# Altium PCB main.PcbDoc
Units mm, origin at the board's own origin, x right, y up, seen from the top; angles counter-clockwise.
Board outline 50 x 50 mm, 4 copper layers (Top Layer, Ground Layer, Power Layer, Bottom Layer), stack 1.591 mm thick; 34 components, 22 nets, 107 pads, 33 vias.
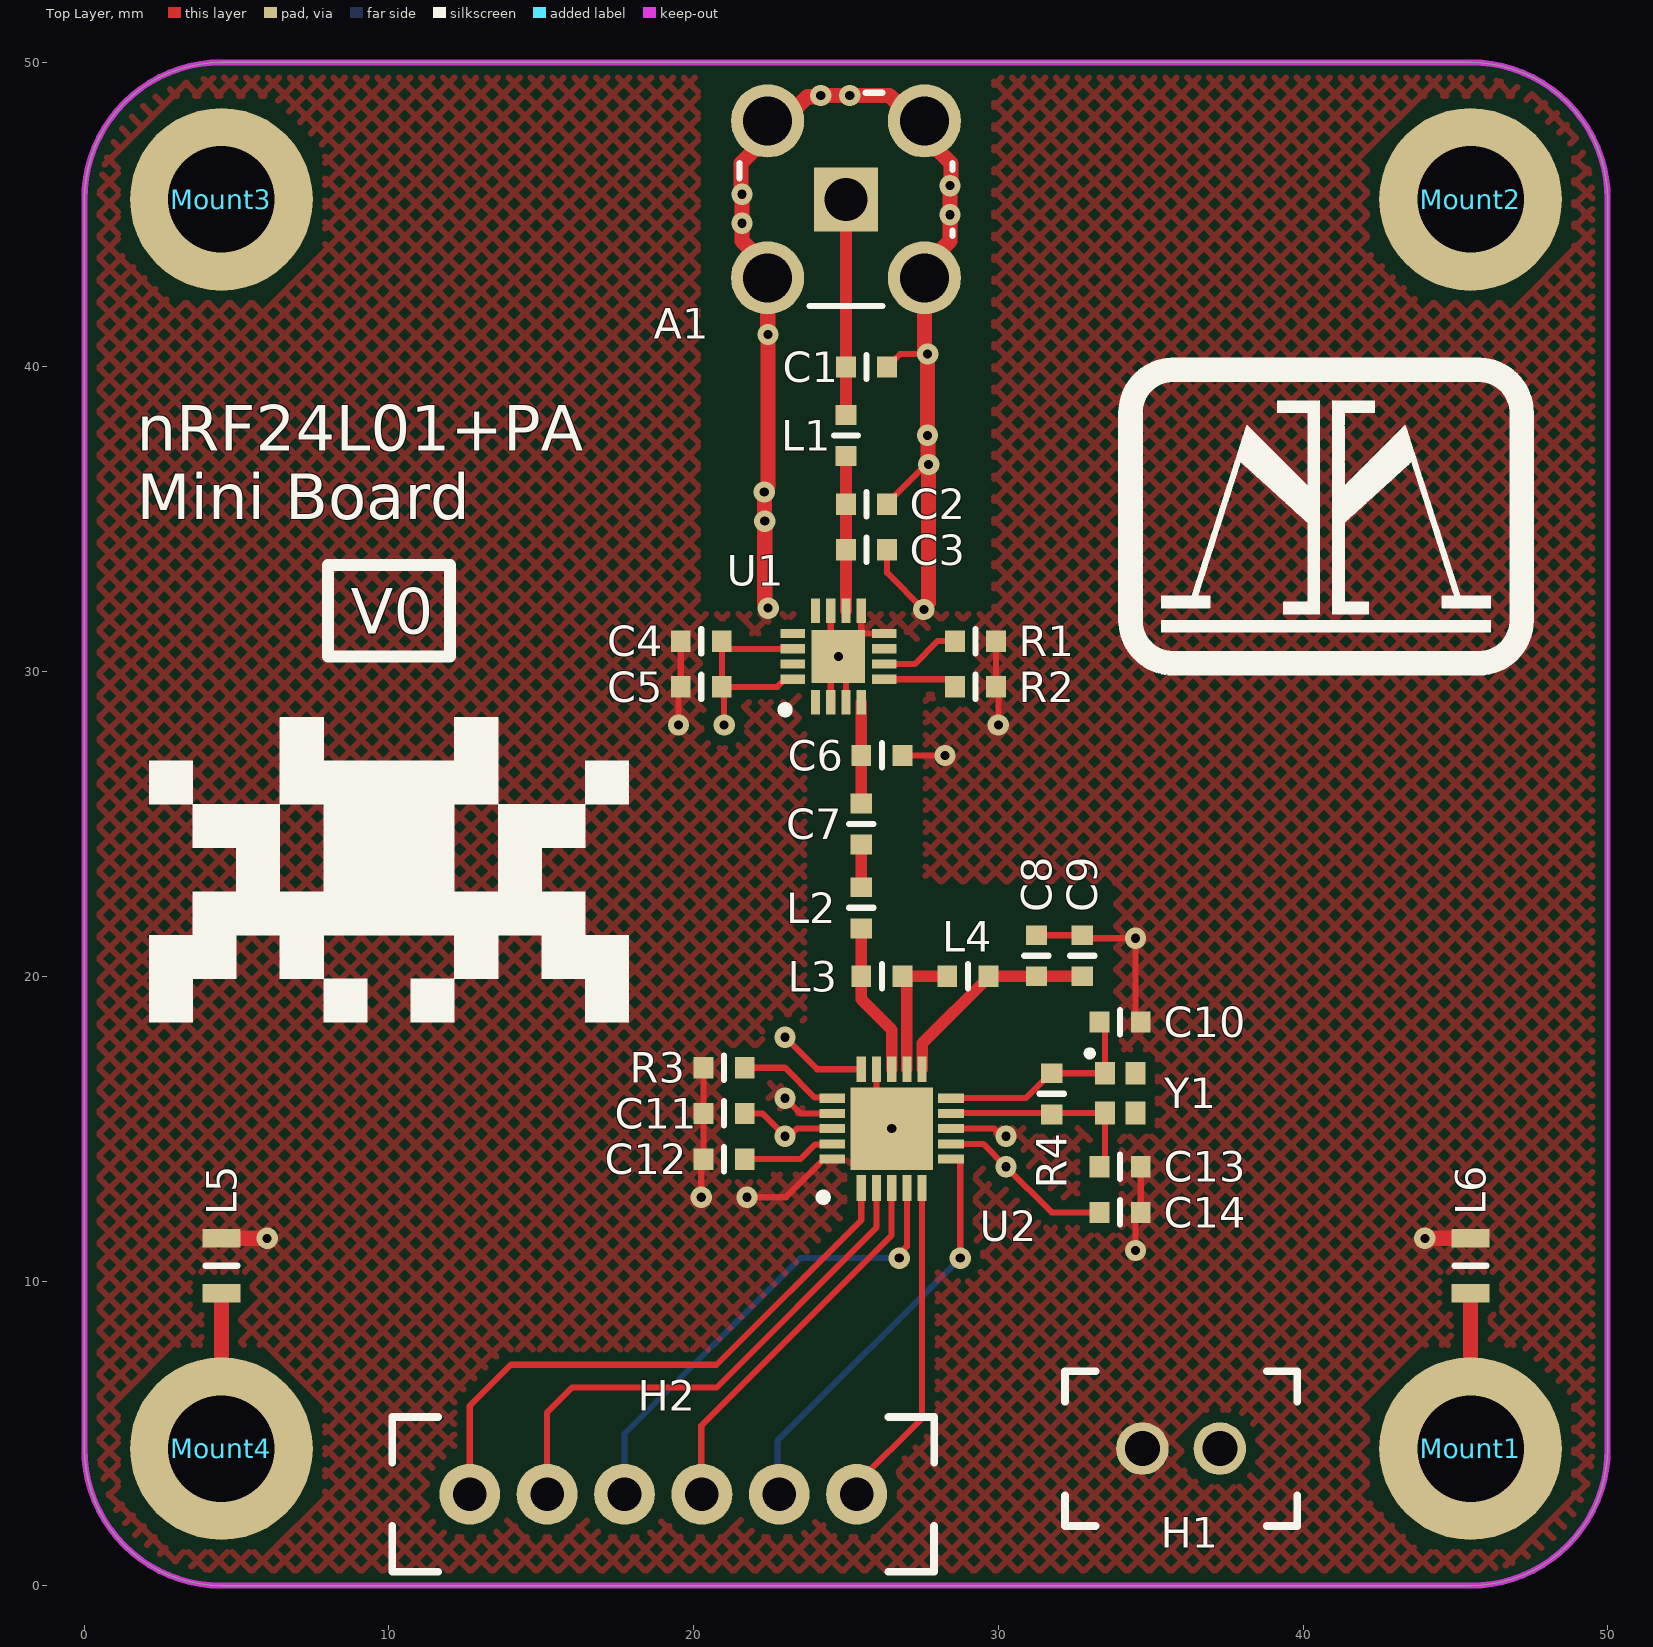
[diagram p0: Top Layer view]
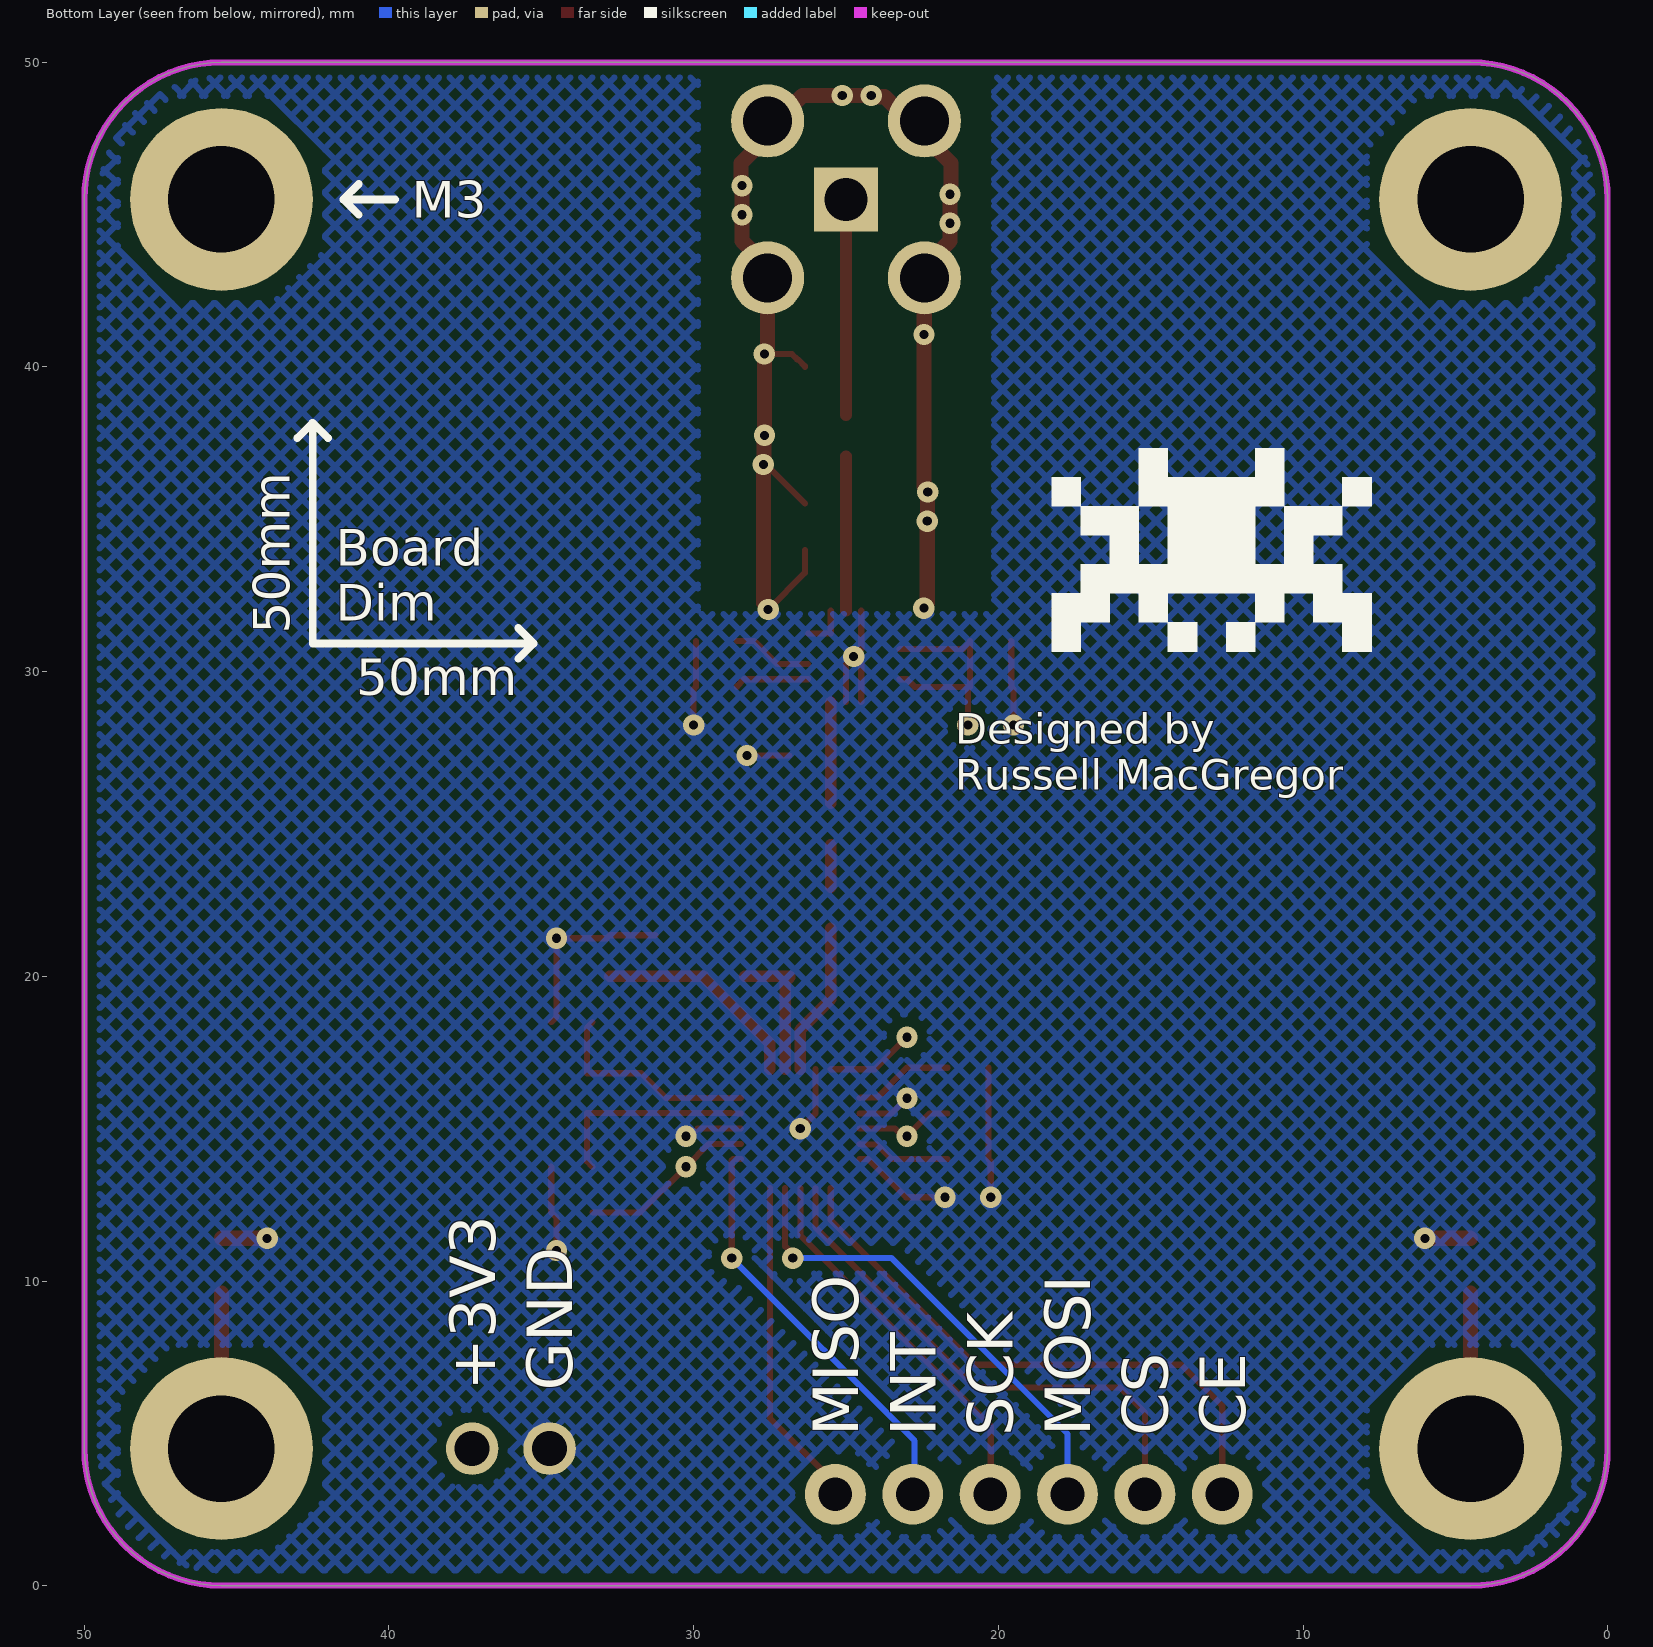
[diagram p1: Bottom Layer view, seen from below]
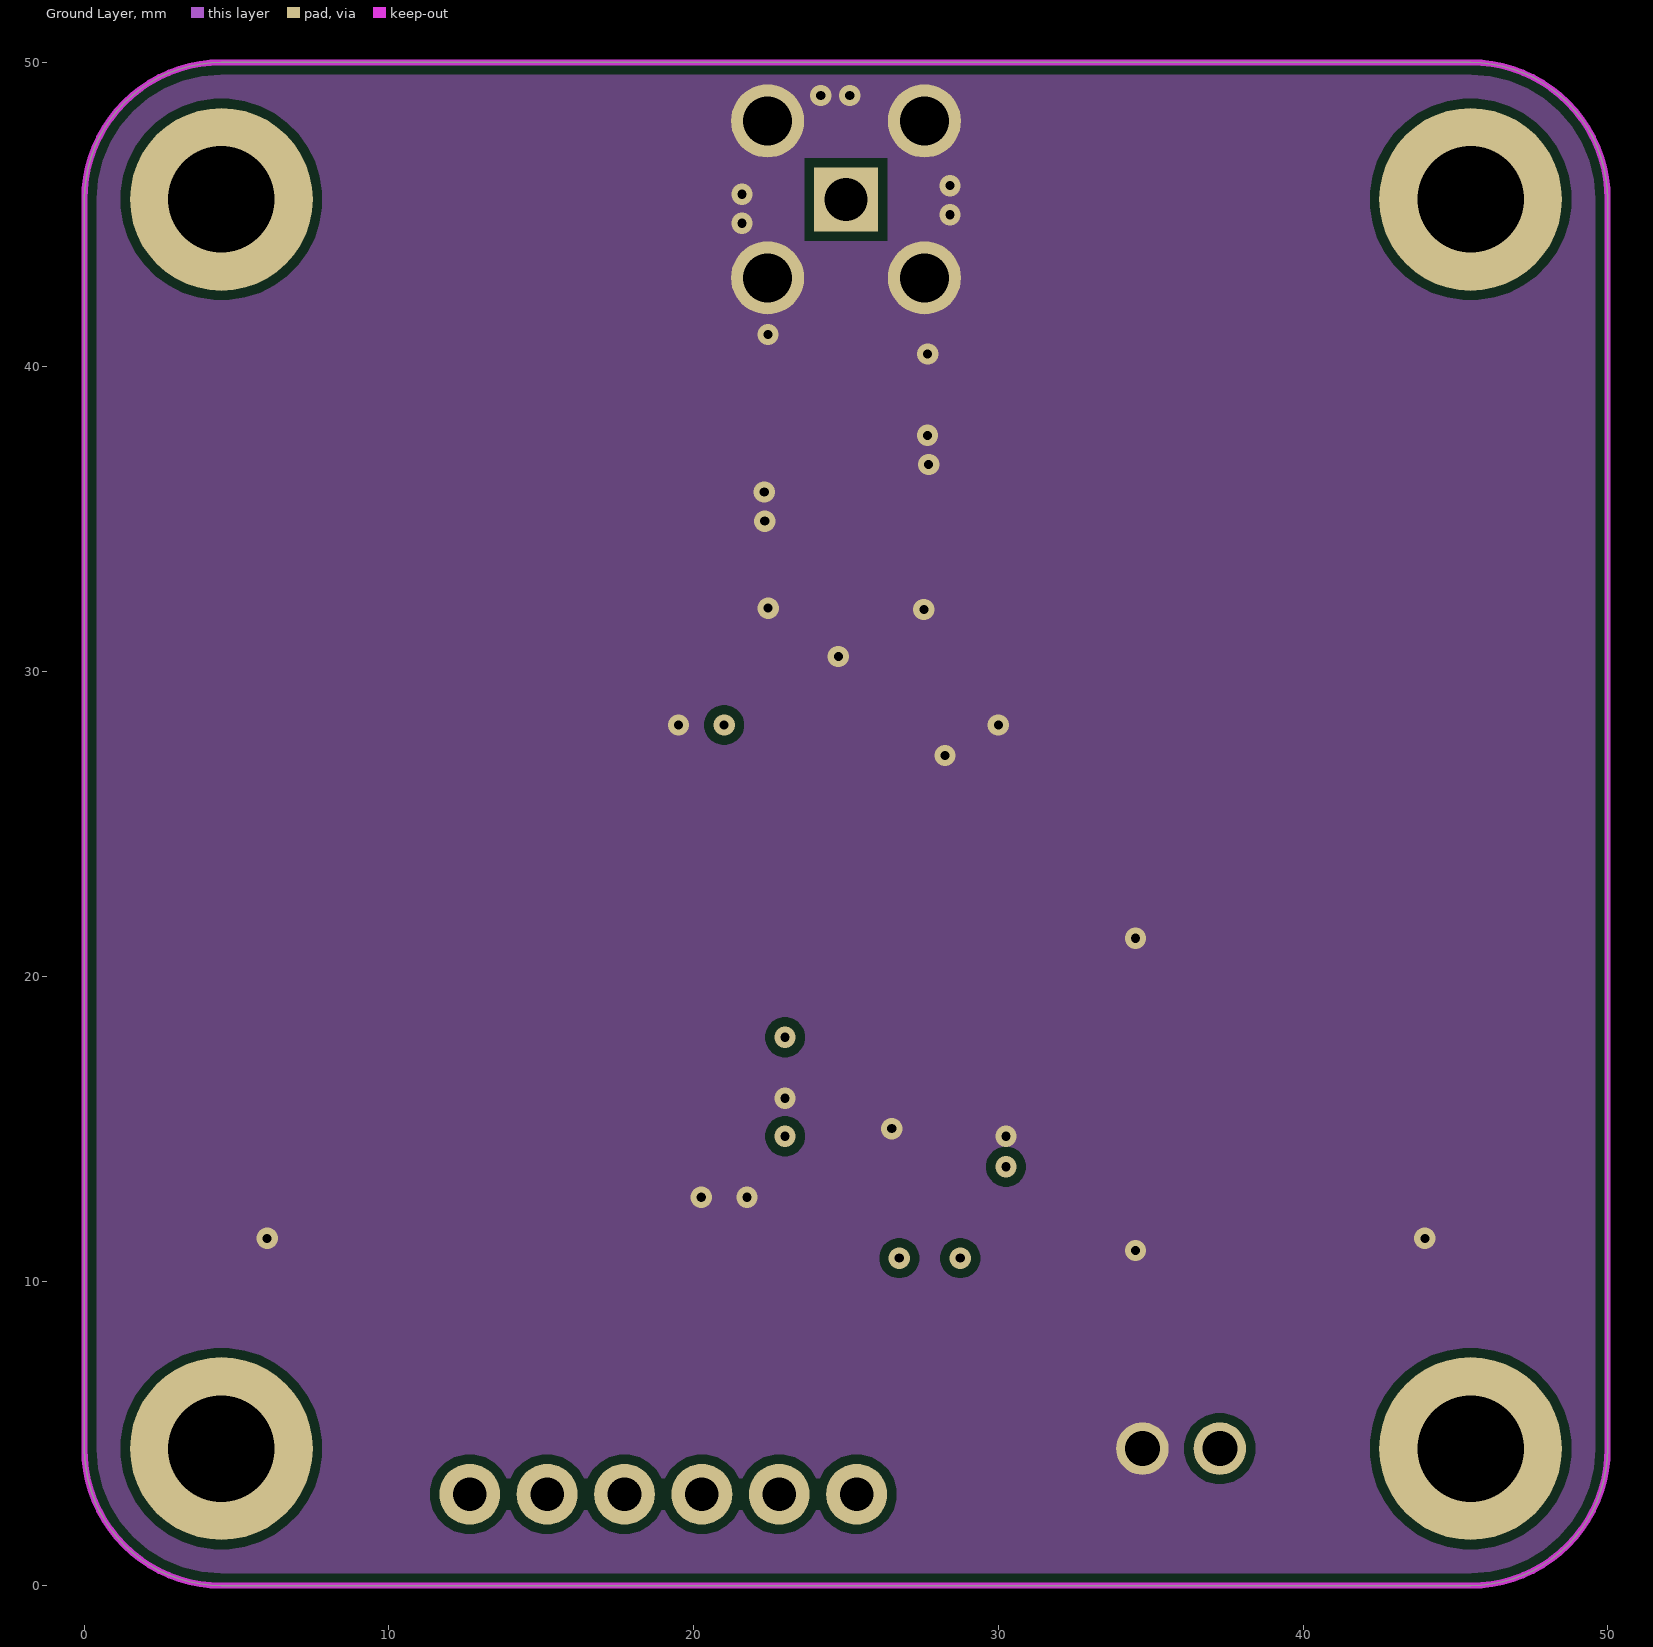
[diagram p2: Ground Layer]
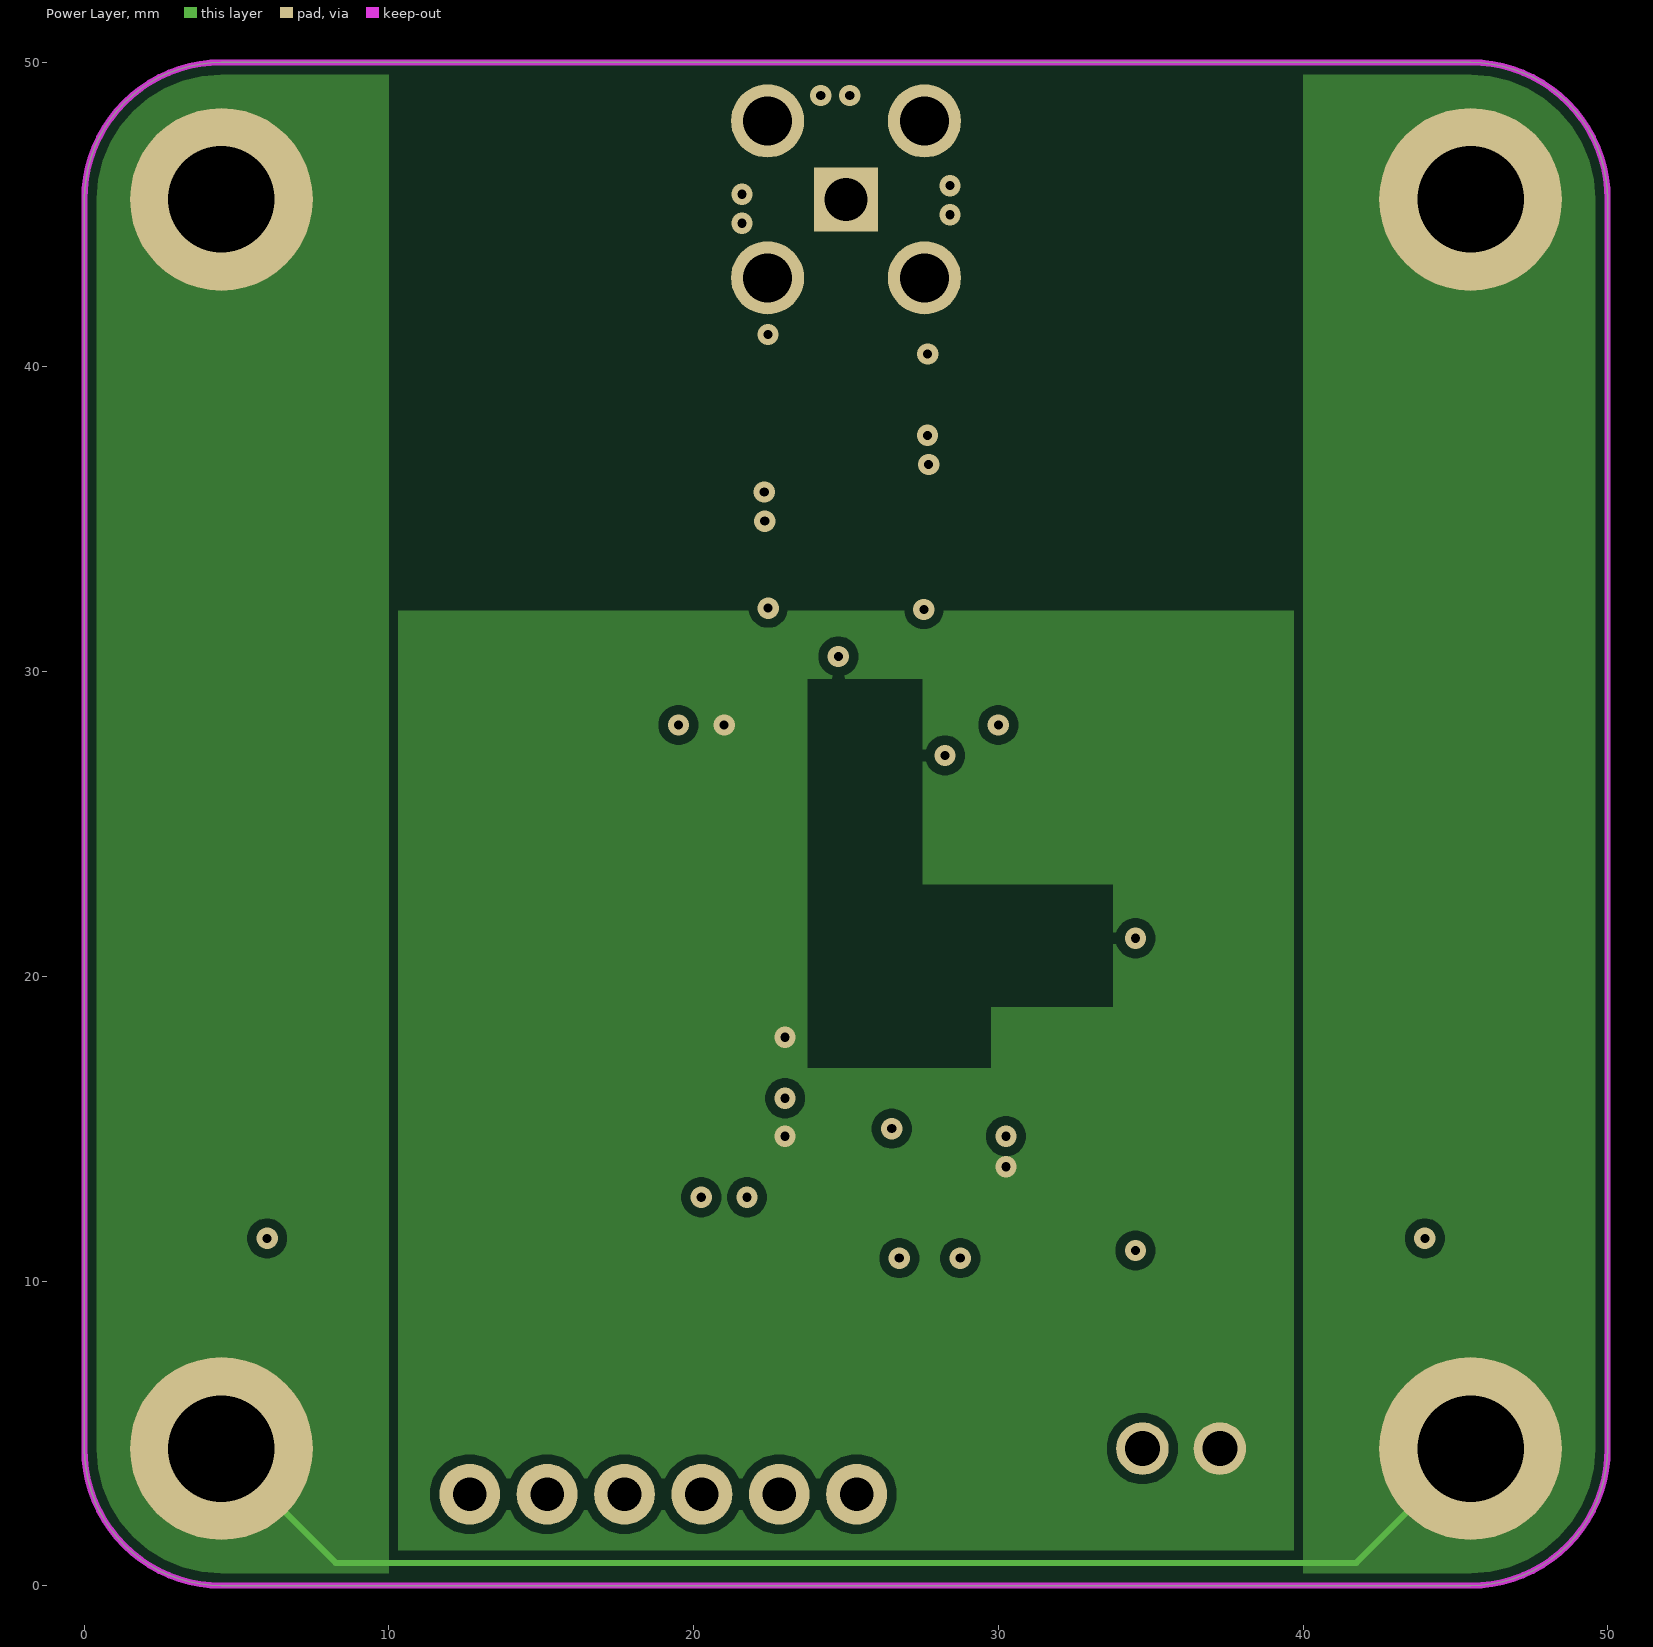
[diagram p3: Power Layer]
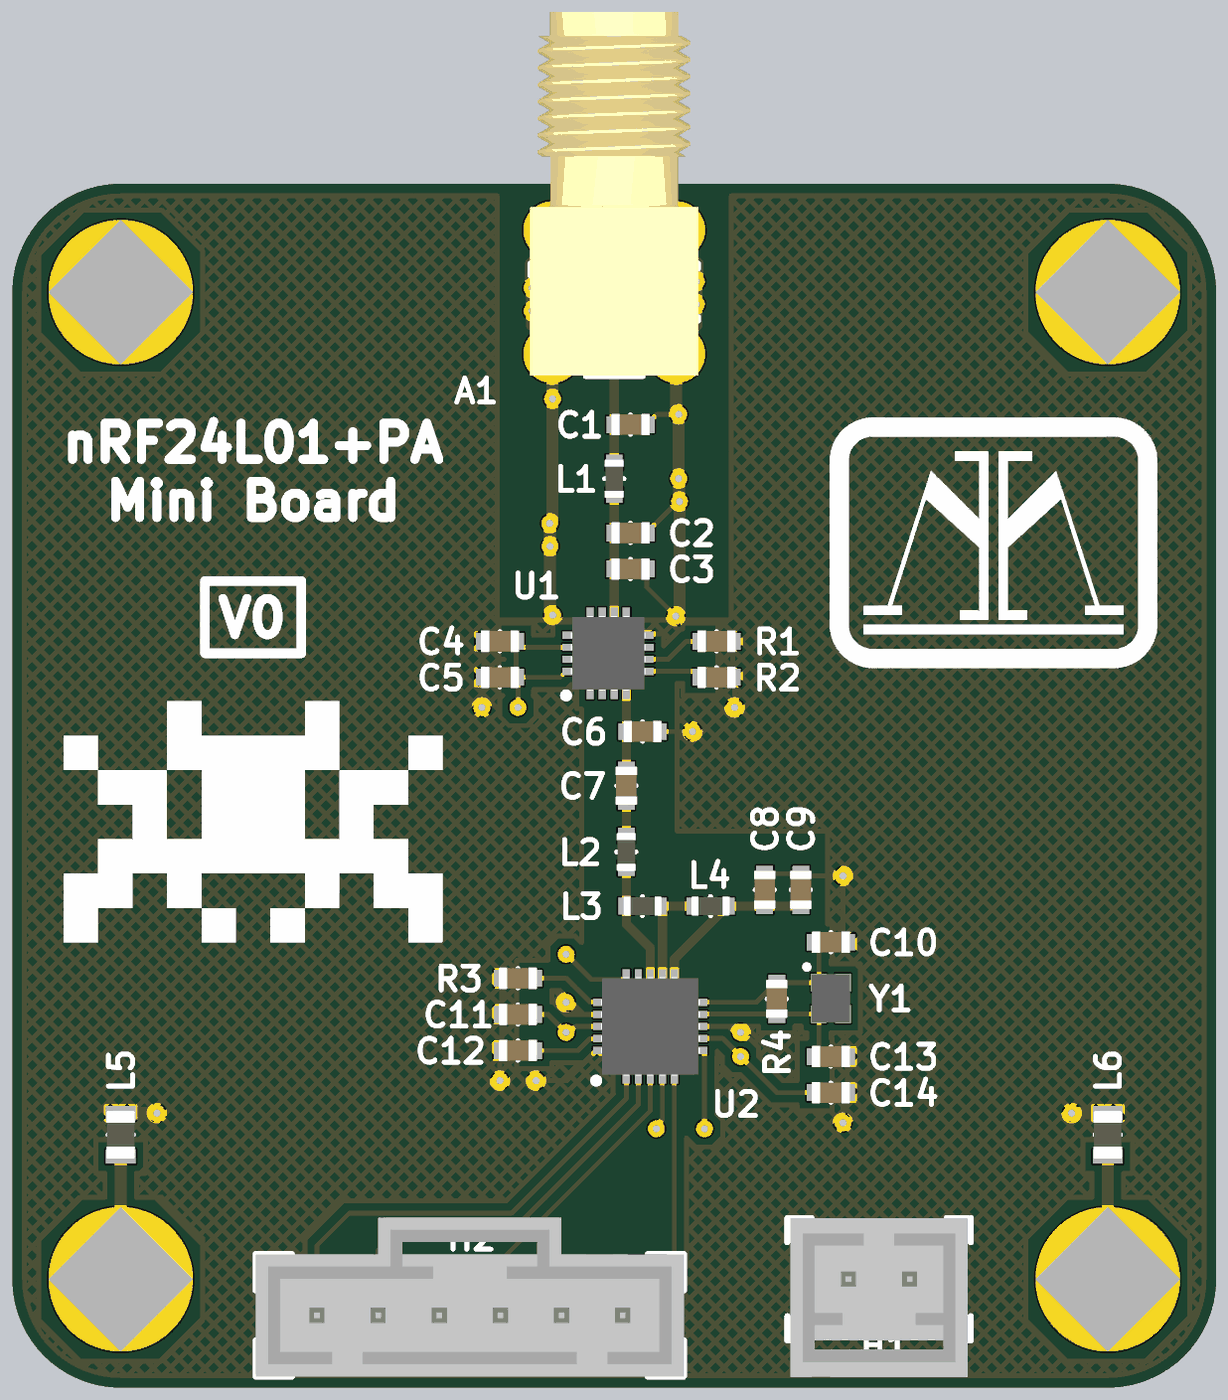
[diagram p4: 3D render of the assembled board from above, using the file's embedded part models]

## Layer stack, top to bottom
Top Solder: solder mask 0.0102, Solder Resist, Dk 3.8
Top Layer: signal copper 0.035
Dielectric 2: prepreg 0.2104, 7628*1, Dk 4.4
Ground Layer: signal copper 0.0175
Dielectric 1: dielectric 1.065, FR-4, Dk 4.8
Power Layer: signal copper 0.0175
Dielectric 3: prepreg 0.2104, 7628*1, Dk 4.4
Bottom Layer: signal copper 0.035
Bottom Solder: solder mask 0.0102, Solder Resist, Dk 3.8

## Board outline
4.5,0 cw(c4.5,4.5) 0,4.5 0,45.5 cw(c4.5,45.5) 4.5,50 45.5,50 cw(c45.5,45.5) 50,45.5 50,4.5 cw(c45.5,4.5) 45.5,0

## Design rules (kind name [scope] priority, off if disabled: settings)
BoardOutlineClearance [All] p1: gap=0.2 ignorepadtopadclearanceinfootprint=FALSE
Clearance "inPolygon Clearance" [InPolygon] p1: gap=0.3 ignorepadtopadclearanceinfootprint=TRUE // this rule ensures that every net within a polygon of a different net has a set clearance from the poly
Clearance "Different Diff Pair" [All] p2: gap=0.2 ignorepadtopadclearanceinfootprint=TRUE
Clearance "Same Diff Pair" [All] p3: gap=0.1 ignorepadtopadclearanceinfootprint=TRUE
Clearance "Different Nets" [not InAnyDifferentialPair] p4: gap=0.3 ignorepadtopadclearanceinfootprint=TRUE except(0.1: Arc-SMDPad Arc-THPad Arc-Via Arc-Text Track-SMDPad Track-THPad Track-Via Track-Text SMDPad-Text THPad-Text Via-Text Fill-Text Poly-Text Region-Text Text-Text; 0.12: Arc-Arc Arc-Track Track-Track; 0.15: SMDPad-SMDPad SMDPad-THPad SMDPad-Via THPad-THPad THPad-Via Via-Via; 0.2: Arc-Hole Track-Hole SMDPad-Hole THPad-Hole Via-Hole Fill-Hole Poly-Hole Region-Hole Text-Hole)
Clearance "Same Net" [not InAnyDifferentialPair] p5: gap=0 ignorepadtopadclearanceinfootprint=TRUE except(0.1: THPad-Via; 0.18: Arc-Arc Arc-Track Track-Track)
ComponentClearance [All] p1: gap=0.102 collisioncheckmode=3 verticalgap=0.102 showdistances=TRUE
DiffPairsRouting "Ethernet Routing" [InDifferentialPairClass('Ethernet_Pairs')] p1: maxlimit=0.25 minlimit=0.2 mostfreqgap=0.25 toplayer_maxgap=0.2 toplayer_prefgap=0.2 toplayer_minwidth=0.25 toplayer_maxwidth=0.25 toplayer_prefwidth=0.25 midlayer1_mingap=0.25 midlayer1_minwidth=0.19 midlayer1_maxwidth=0.19 midlayer1_prefwidth=0.19 midlayer2_mingap=0.25 midlayer2_minwidth=0.19 midlayer2_maxwidth=0.19 midlayer2_prefwidth=0.19 bottomlayer_maxgap=0.2 bottomlayer_prefgap=0.2 bottomlayer_minwidth=0.25 bottomlayer_maxwidth=0.25 bottomlayer_prefwidth=0.25 impedanceprofiledriven=TRUE maxuncoupledlength=12.7
DiffPairsRouting "USB Routing" [InDifferentialPairClass('USB_Pairs')] p2: maxlimit=0.291 minlimit=0.127 mostfreqgap=0.291 toplayer_maxgap=0.127 toplayer_prefgap=0.127 toplayer_minwidth=0.23 toplayer_maxwidth=0.23 toplayer_prefwidth=0.23 midlayer1_mingap=0.291 midlayer1_minwidth=0.25 midlayer1_maxwidth=0.25 midlayer1_prefwidth=0.25 midlayer2_mingap=0.291 midlayer2_minwidth=0.25 midlayer2_maxwidth=0.25 midlayer2_prefwidth=0.25 bottomlayer_maxgap=0.127 bottomlayer_prefgap=0.127 bottomlayer_minwidth=0.23 bottomlayer_maxwidth=0.23 bottomlayer_prefwidth=0.23 impedanceprofiledriven=TRUE maxuncoupledlength=12.7
DiffPairsRouting "CAN Routing" [InDifferentialPairClass('CAN_Pairs')] p3: maxlimit=0.907 minlimit=0.5 mostfreqgap=0.907 toplayer_maxgap=0.5 toplayer_prefgap=0.5 toplayer_minwidth=0.201 toplayer_maxwidth=0.201 toplayer_prefwidth=0.201 midlayer1_mingap=0.907 midlayer1_minwidth=0.155 midlayer1_maxwidth=0.155 midlayer1_prefwidth=0.155 midlayer2_mingap=0.907 midlayer2_minwidth=0.155 midlayer2_maxwidth=0.155 midlayer2_prefwidth=0.155 bottomlayer_maxgap=0.5 bottomlayer_prefgap=0.5 bottomlayer_minwidth=0.201 bottomlayer_maxwidth=0.201 bottomlayer_prefwidth=0.201 impedanceprofiledriven=TRUE maxuncoupledlength=12.7
Height [All] p1: minheight=0 maxheight=1816.048 prefheight=12.7
HoleSize [All] p1: absolutevalues=TRUE maxlimit=6.3 minlimit=0.3 maxpercent=80.000 minpercent=20.000
HoleToHoleClearance [All] p1: gap=0.25 allowstackedmicrovias=FALSE
Length [All] p1: maxlimit=43.432 minlimit=0 usedelayunits=TRUE mindelay=0.000000 maxdelay=10000.000000
MatchedLengths "Diff Pair Matched Delays" [InDifferentialPairClass('Ethernet_Pairs') or InDifferentialPairClass('USB_Pairs') or InDifferentialPairClass('CAN_Pairs')] p1: tolerance=5 checknetsindiffpair=TRUE checkdiffpairvsdiffpair=FALSE checkxsignals=FALSE checkothers=FALSE usedelayunits=TRUE delaytolerance=100.000000
MinimumAnnularRing [All] p1: minimumring=0.2
MinimumSolderMaskSliver [All] p1: minsoldermaskwidth=0
PlaneClearance "Supply Net Clearance" [InNetClass('Supply_Nets')] p1: clearance=0.5
PlaneClearance "All Nets" [All] p2: clearance=0.3
PolygonConnect "Supply Nets" [InNetClass('Supply_Nets')] p1: connectstyle=Direct reliefconductorwidth=0.3 reliefentries=4 polygonreliefangle="90 Angle" airgapwidth=0.254
PolygonConnect General [All] p2: connectstyle=Relief reliefconductorwidth=0.254 reliefentries=4 polygonreliefangle="90 Angle" airgapwidth=0.254
RoutingVias [All] p1: holewidth=0.2 width=0.35 viastyle="Through Hole" minholewidth=0.15 minwidth=0.3 maxholewidth=6.3 maxwidth=6.55
SilkToSilkClearance [All] p1: silktosilkclearance=0
SilkToSolderMaskClearance [All] p1: minsilkscreentomaskgap=0 clearancetoexposedcopper=TRUE
SolderMaskExpansion [All] p1: expansion=0.075 istentingtop=FALSE
SupplyNets "Schematic Supply Nets" [InNet('Earth')] p1: voltage=0.000
SupplyNets "Schematic Supply Nets_7" [InNet('+3V3')] p2: voltage=0.000
SupplyNets "Schematic Supply Nets_3" [InNet('GND')] p3: voltage=0.000
UnRoutedNet [All] p1: checkbadconnections=TRUE
Width "nRF Width" [InNetClass('nRF Signal')] p1: maxlimit=0.379 minlimit=0.263 preferedwidth=0.379 toplayer_minwidth=0.379 midlayer1_maxwidth=0.263 midlayer1_prefwidth=0.263 midlayer2_maxwidth=0.263 midlayer2_prefwidth=0.263 bottomlayer_minwidth=0.379 impedanceprofiledriven=TRUE minimp=50.000000 maximp=50.000000 favimp=50.000000 checkconnectedcopper=TRUE
Width [All] p2: maxlimit=100 minlimit=0.1 preferedwidth=0.2
20 further rules are at their usual default settings.

## Classes and differential pairs
net class Supply_Nets: +3V3 Earth GND
net class "nRF Signal": ANT1 ANT2 NetC2_2 NetC7_2 "SMA Antenna" TXRX VDD_PA
component class Main: A1 C1 C2 C3 C4 C5 C6 C7 C8 C9 C10 C11 C12 C13 C14 L1 L2 L3 L4 R1 R2 R3 R4 U1 U2 Y1
component class Connections: H1 H2 L5 L6 Mount1 Mount2 Mount3 Mount4

## Components (designator, comment, footprint, x,y, rotation, side; value= is the part's Value field where it differs from the comment)
A1 "RP-SMA 50-Ohm" "[SMA] RP-SMA 90deg Jack" 25,45.5 r0 top
C1 "SMD Nonpolarized" "[Cap] SMD 0603" 25.675,40 r180 top
C2 "SMD Nonpolarized" "[Cap] SMD 0603" 25.675,35.5 r180 top
C3 "SMD Nonpolarized" "[Cap] SMD 0603" 25.675,34 r180 top
C4 "SMD Nonpolarized" "[Cap] SMD 0603" 20.25,31 r0 top
C5 "SMD Nonpolarized" "[Cap] SMD 0603" 20.25,29.5 r0 top
C6 "SMD Nonpolarized" "[Cap] SMD 0603" 26.175,27.25 r0 top
C7 "SMD Nonpolarized" "[Cap] SMD 0603" 25.5,25 r270 top
C8 "SMD Nonpolarized" "[Cap] SMD 0603" 31.25,20.675 r270 top
C9 "SMD Nonpolarized" "[Cap] SMD 0603" 32.75,20.675 r270 top
C10 "SMD Nonpolarized" "[Cap] SMD 0603" 34,18.5 r0 top
C11 "SMD Nonpolarized" "[Cap] SMD 0603" 21,15.5 r0 top
C12 "SMD Nonpolarized" "[Cap] SMD 0603" 21,14 r0 top
C13 "SMD Nonpolarized" "[Cap] SMD 0603" 34,13.75 r0 top
C14 "SMD Nonpolarized" "[Cap] SMD 0603" 34,12.25 r180 top
H1 "1x2 Male" "[Header] Shrouded 1x2 Male" 36,4.5 r180 top
H2 "[Header] Shrouded 1x6 Male" "[Header] Shrouded 1x6 Male" 19,3 r0 top
L1 "SMD Inductor" "[Inductor] SMD 0603" 25,37.75 r90 top
L2 "SMD Inductor" "[Inductor] SMD 0603" 25.5,22.25 r90 top
L3 "SMD Inductor" "[Inductor] SMD 0603" 26.175,20 r180 top
L4 "SMD Inductor" "[Inductor] SMD 0603" 29,20 r0 top
L5 "652-MH2029-300Y" "[Ferrite] SMD Bead 0805 (1)" 4.5,10.5 r90 top
L6 "652-MH2029-300Y" "[Ferrite] SMD Bead 0805 (1)" 45.5,10.5 r90 top
Mount1 "M3 Mount Hole" "[Mount] M3 Mount Hole" 45.5,4.5 r0 top
Mount2 "M3 Mount Hole" "[Mount] M3 Mount Hole" 45.5,45.5 r0 top
Mount3 "M3 Mount Hole" "[Mount] M3 Mount Hole" 4.5,45.5 r0 top
Mount4 "M3 Mount Hole" "[Mount] M3 Mount Hole" 4.5,4.5 r0 top
R1 "[Res] SMD Resistor" "[Res] SMD 0603" 29.25,31 r180 top
R2 "[Res] SMD Resistor" "[Res] SMD 0603" 29.25,29.5 r180 top
R3 "[Res] SMD Resistor" "[Res] SMD 0603" 21,17 r0 top
R4 "[Res] SMD Resistor" "[Res] SMD 0603" 31.75,16.145 r270 top
U1 "RFX2401C" "[IC] RF Front-End" 24.75,30.5 r90 top
U2 "NRF24L01P" "[IC] NRF Transceiver" 26.5,15 r90 top
Y1 "16 MHz" "[XTAL] SMD 16MHz (2)" 34,16.17 r270 top

## Footprints (in the part's own frame and the unit in brackets; to place one, negate y for a bottom-side part, rotate by r counter-clockwise, add the part's x,y. Pads: shape width x height; smd on the part's side, far side on the other; paste and mask are expansions set on the pad)
"[Cap] SMD 0603" [mm]
  rect 0.65x0.7 smd: 1(-0.675,0) 2(0.675,0)
  silkscreen extent 0,-0.4 0,0.4, body extent -0.8,-0.45 0.8,0.45, height 0.8
"[Ferrite] SMD Bead 0805 (1)" [mm]
  rect 0.6x1.25 smd: 1(-0.9,0) 2(0.9,0)
  silkscreen extent 0,-0.53 0,0.53, body extent -1,-0.6 1,0.6, height 1.1
"[Header] Shrouded 1x2 Male" [mm]
  round 1.725 hole 1.15: 1(-1.27,0) 2(1.27,0)
  silkscreen extent -3.81,-2.54 3.81,2.54, body extent -3.68,-2.54 3.68,4.06, height 11.71
"[Header] Shrouded 1x6 Male" [mm]
  round 2 hole 1.1: 1(-6.35,0) 2(-3.81,0) 3(-1.27,0) 4(1.27,0) 5(3.81,0) 6(6.35,0)
  silkscreen extent -8.9,-2.54 8.9,2.54, body extent -8.89,-2.54 8.89,4.06, height 11.49
"[IC] NRF Transceiver" [mm] "NRF24L01P-R"
  rect 0.85x0.3 smd: 1(-1.95,1) 2(-1.95,0.5) 3(-1.95,0) 4(-1.95,-0.5) 5(-1.95,-1) 11(1.95,-1) 12(1.95,-0.5) 13(1.95,0) 14(1.95,0.5) 15(1.95,1)
  rect 0.3x0.85 smd: 6(-1,-1.95) 7(-0.5,-1.95) 8(0,-1.95) 9(0.5,-1.95) 10(1,-1.95) 16(1,1.95) 17(0.5,1.95) 18(0,1.95) 19(-0.5,1.95) 20(-1,1.95)
  rect 2.7x2.7 smd: 21(0,0)
  silkscreen extent -2.37,2.12 -2.13,2.37, body extent -2.05,-2.05 2.05,2.05, height 0.95
"[IC] RF Front-End" [mm] "RFX2401C"
  rect 0.8x0.3 smd: 1(-1.5,0.75) 2(-1.5,0.25) 3(-1.5,-0.25) 4(-1.5,-0.75) 9(1.5,-0.75) 10(1.5,-0.25) 11(1.5,0.25) 12(1.5,0.75)
  rect 0.3x0.8 smd: 5(-0.75,-1.5) 6(-0.25,-1.5) 7(0.25,-1.5) 8(0.75,-1.5) 13(0.75,1.5) 14(0.25,1.5) 15(-0.25,1.5) 16(-0.75,1.5)
  rect 1.75x1.75 smd: 17(0,0)
  silkscreen extent -1.87,1.62 -1.63,1.87, body extent -1.55,-1.55 1.55,1.55, height 0.6
"[Inductor] SMD 0603" [mm]
  rect 0.65x0.7 smd: 1(-0.675,0) 2(0.675,0)
  silkscreen extent 0,-0.4 0,0.4, body extent -0.8,-0.4 0.8,0.4, height 0.95
"[Mount] M3 Mount Hole" [mm] "Place at least 4.5mm from board edge. Plated."
  round 6 hole 3.5: 1(0,0)
"[Res] SMD 0603" [mm]
  rect 0.65x0.7 smd: 1(-0.675,0) 2(0.675,0)
  silkscreen extent 0,-0.4 0,0.4, body extent -0.8,-0.45 0.8,0.45, height 0.8
"[SMA] RP-SMA 90deg Jack" [mm]
  rect 2.1x2.1 hole 1.4: 1(0,0)
  round 2.4 hole 1.6: 2(-2.575,-2.575) 3(2.575,-2.575) 4(2.575,2.575) 5(-2.575,2.575)
  silkscreen extent -3.5,-3.5 3.5,3.5, body extent -3.5,-3.46 3.5,11.64, height 9.85
"[XTAL] SMD 16MHz (2)" [mm] "ABM11-16.000MHZ-12-N1G-T"
  rect 0.75x0.65 smd: 1(-0.65,-0.5) 2(0.65,-0.5) 3(0.65,0.5) 4(-0.65,0.5)
  silkscreen extent -1.4,-1.1 -1.2,-0.9, body extent -1,-0.8 1,0.8, height 0.69

## Part data
A1: library part "[SMA] RP-SMA 90deg Jack", "PCB.RPSMAFRA.HT", Supplier Part Number 1=931-1360-ND, Supplier 1=DigiKey
C1 C2: library part "[Cap] SMD Nonpolarized", Capacitance=1.2pF, Size Package=0603, Supplier Part Number 1=4713-CHV0603N2501R2BCT-ND, Tolerance=1%, Voltage=6.3V, Supplier 1=DigiKey
C3: library part "[Cap] SMD Nonpolarized", Capacitance=0.3pF, Size Package=0603, Supplier Part Number 1=712-QSCP251Q0R3A1GV001TCT-ND, Tolerance=5%, Voltage=6.3V, Supplier 1=DigiKey
C4: library part "[Cap] SMD Nonpolarized", Capacitance=1uF, Size Package=0603, Supplier Part Number 1=311-3485-1-ND, Tolerance=5%, Voltage=6.3V, Supplier 1=DigiKey
C5: library part "[Cap] SMD Nonpolarized", Capacitance=220pF, Size Package=0603, Supplier Part Number 1=399-C0603C221J5GAC7411CT-ND, Tolerance=5%, Voltage=6.3V, Supplier 1=DigiKey
C6: library part "[Cap] SMD Nonpolarized", Capacitance=1.0pF, Size Package=0603, Supplier Part Number 1=311-1049-1-ND, Tolerance=5%, Voltage=6.3V, Supplier 1=DigiKey
C7: library part "[Cap] SMD Nonpolarized", Capacitance=1.5pF, Size Package=0603, Supplier Part Number 1=311-1737-1-ND, Tolerance=5%, Voltage=6.3V, Supplier 1=DigiKey
C8: library part "[Cap] SMD Nonpolarized", Capacitance=4.7pF, Size Package=0603, Supplier Part Number 1=13-CC0603CPNPO9BN4R7CT-ND, Tolerance=5%, Voltage=6.3V, Supplier 1=DigiKey
C9: library part "[Cap] SMD Nonpolarized", Capacitance=2.2nF, Size Package=0603, Supplier Part Number 1=490-1459-1-ND, Tolerance=5%, Voltage=6.3V, Supplier 1=DigiKey
C10 C13: library part "[Cap] SMD Nonpolarized", Capacitance=14pF, Size Package=0603, Supplier Part Number 1=311-3887-1-ND, Tolerance=1%, Voltage=6.3V, Supplier 1=DigiKey
C11: library part "[Cap] SMD Nonpolarized", Capacitance=1nF, Size Package=0603, Supplier Part Number 1=490-1451-6-ND, Tolerance=5%, Voltage=6.3V, Supplier 1=DigiKey
C12: library part "[Cap] SMD Nonpolarized", Capacitance=33nF, Size Package=0603, Supplier Part Number 1=311-4015-1-ND, Tolerance=5%, Voltage=6.3V, Supplier 1=DigiKey
C14: library part "[Cap] SMD Nonpolarized", Capacitance=10nF, Size Package=0603, Supplier Part Number 1=399-C0603C103J5RACTUDKR-ND, Tolerance=5%, Voltage=6.3V, Supplier 1=DigiKey
H1: library part "[Header] Shrouded 1x2 Male", "0705430036 / Mates with 0050579402", Supplier Part Number 1=WM4824-ND, Supplier 1=DigiKey, Supplier 2=DigiKey, Supplier Part Number 2=WM2900-ND
H2: "0705430005 / Mates with 0050579406", Supplier Part Number 1=WM4804-ND, Supplier 1=DigiKey, Supplier 2=DigiKey, Supplier Part Number 2=WM2904-ND
L1: library part "[Inductor] SMD Inductor", Inductance=2.7nH, Size Package=0603, Supplier Part Number 1=732-7447860027GCT-ND, Supplier 1=DigiKey
L2: library part "[Inductor] SMD Inductor", Inductance=3.9nH, Size Package=0603, Supplier Part Number 1=490-1105-1-ND, Supplier 1=DigiKey
L3: library part "[Inductor] SMD Inductor", Inductance=8.2nH, Size Package=0603, Supplier Part Number 1=490-1109-1-ND, Supplier 1=DigiKey
L4: library part "[Inductor] SMD Inductor", Inductance=2.7nH, Size Package=0603, Supplier Part Number 1=490-1103-1-ND, Supplier 1=DigiKey
L5 L6: library part "[Ferrite] SMD Ferrite Bead (1)", Res @ Freq="30 @ 100MHz", Size Package=0805, Supplier Part Number 1=MH2029-300YCT-ND, Supplier 1=DigiKey
Mount1 Mount2 Mount3 Mount4: library part "[Mount] M3 Mount Hole", "Place at least 4.5mm from board edge. Plated."
R1 R2: "Generic", Resistance=10k, Size Package=0603, Supplier Part Number 1=311-10.0KHRDKR-ND, Tolerance=5%, Supplier 1=DigiKey
R3: "Generic", Resistance=22k, Size Package=0603, Supplier Part Number 1=311-22.0HRDKR-ND, Tolerance=1%, Supplier 1=DigiKey
R4: "Generic", Resistance=1Meg, Size Package=0603, Supplier Part Number 1=YAG4498CT-ND, Tolerance=1%, Supplier 1=DigiKey
U1: library part "[IC] RF Front-End", Supplier Part Number 1=863-1828-1-ND, Supplier 1=DigiKey
U2: library part "[IC] NRF Transceiver", "NRF24L01P-R", Supplier Part Number 1=4823-NRF24L01P-RCT-ND, Supplier 1=DigiKey
Y1: library part "[XTAL] SMD 16MHz (2)", "ABM11-16.000MHZ-12-N1G-T", Supplier Part Number 1=535-14950-1-ND, Supplier 1=DigiKey

## Via types
v1: diameter 0.7, hole 0.3, Top Layer to Bottom Layer, 33 vias

## Nets (pads, with @x,y where several pads share a name; then routed paths per layer and width w, separated by ;. In a path a pad name is that pad's centre, name@x,y a point inside that pad or via, vN(x,y) a via of type N, cw(c..) or ccw(c..) an arc to the next point about the centre after c; other vN are vias at no path point)
+3V3: C4.2 C5.2 C11.2 C14.2 H1.1 U1.14 U1.16 U2.7 U2.15 U2.18 | length 19.7
  Top Layer w0.2: C4.2@20.925,30.975 21.15,30.75 U1.14 ; C4.2 C5.2 ; v1(21,28.25) 21,29.425 C5.2 ; C11.2 22.25,15.5 v1(23,14.75) 23.135,14.75 23.385,15 U2.18 ; v1(23,18) 24.05,16.95 U2.15 ; U1.16 23,29.75 22.75,29.5 C5.2 ; U2.7 29.5,14.5 v1(30.25,13.75) 31.75,12.25 C14.2
ANT1: L3.1 L4.1 U2.12 | length 4.6
  Top Layer w0.379: U2.12 27,19.825 26.85,19.975 L3.1 L4.1
ANT2: L2.1 L3.2 U2.13 | length 5
  Top Layer w0.379: L2.1 L3.2 25.5,19.25 26.5,18.25 U2.13
Earth: L5.1 L6.1 Mount1.1 Mount2.1 Mount3.1 Mount4.1 | length 54.3
  Top Layer w0.5: Mount4.1 L5.1 ; Mount1.1 L6.1
  Power Layer w0.2: Mount4.1 8.25,0.75 41.75,0.75 Mount1.1
GND: A1.2 A1.3 A1.4 A1.5 C1.1 C2.1 C3.1 C4.1 C5.1 C6.2 C8.1 C9.1 C10.2 C11.1 C12.1 C13.2 C14.1 H1.2 L5.2 L6.2 R1.1 R2.1 R3.1 U1.2 U1.3 U1.8 U1.9 U1.11 U1.17 U2.8 U2.14 U2.17 U2.20 U2.21 | length 82.8
  Top Layer w0.2: v1(19.5,28.25) 19.5,29.425 C5.1 C4.1 ; v1(20.25,12.75) 20.25,13.925 C12.1 C11.1 R3.1 ; v1(21.75,12.75) 23.025,12.75 24.275,14 U2.20 ; v1(23,16) 23.5,15.5 U2.17 ; U1.2 24.5,30.25 v1(24.75,30.5) ; U1.11 24.5,30.75 v1(24.75,30.5) ; U1.3 25,30.25 v1(24.75,30.5) ; U1.9 25.5,31.25 U1.8 ; U2.14 26,15.5 v1(26.5,15) ; C3.1 26.35,33.244 v1(27.555,32.04) ; C2.1@26.35,35.525 27.627,36.802 v1(27.711,36.802) ; C1.1 26.35,40.025 26.575,40.25 26.6,40.25 26.776,40.426 v1(27.679,40.426) ; C6.2 v1(28.25,27.25) ; U2.8 29.865,15 30.115,14.75 v1(30.25,14.75) ; R1.1 R2.1 30,29.425 v1(30,28.25) ; C8.1 C9.1 32.85,21.25 v1(34.5,21.25) 34.5,18.675 C10.2 ; v1(34.5,11) 34.5,12.075 C14.1 C13.2
  Top Layer w0.5: L5.2 v1(6,11.4) ; v1@21.55,45.991 21.55,46.686 A1.5@22.425,47.561 ; v1(21.589,45.671) v1(21.589,44.717) 21.589,44.139 A1.2@22.425,43.303 ; A1.2 22.431,42.919 22.431,41.074 v1(22.437,41.068) 22.437,36.069 22.318,35.95 v1(22.318,35.896) 22.326,35.888 22.326,34.95 v1(22.334,34.942) 22.334,32.251 22.445,32.14 v1(22.445,32.086) ; A1.5 22.939,48.075 23.737,48.873 24.132,48.873 v1(24.17,48.911) v1(25.124,48.911) 26.426,48.911 27.262,48.075 A1.4 27.575,47.561 28.45,46.686 28.45,45.991 v1(28.411,45.952) v1(28.411,44.998) 28.411,44.139 27.575,43.303 A1.3 27.575,40.584 27.679,40.48 v1(27.679,40.426) 27.678,40.425 27.678,37.757 v1(27.676,37.756) 27.694,37.738 27.694,36.82 v1(27.711,36.802) 27.711,32.25 27.555,32.094 v1(27.555,32.04) ; v1(44,11.4) L6.2
NetC2_2: C2.2 C3.2 L1.1 U1.10 | length 5.1
  Top Layer w0.379: U1.10 C3.2 C2.2 L1.1
NetC7_2: C7.2 L2.2 | length 1.4
  Top Layer w0.379: L2.2 C7.2
NetC12_2: C12.2 U2.19 | length 3.1
  Top Layer w0.2: C12.2 23.5,14 23.98,14.48 24.53,14.48 U2.19
NetR1_2: R1.2 U1.6 | length 2.6
  Top Layer w0.2: U1.6 27.25,30.25 28,31 R1.2
NetR2_2: R2.2 U1.5 | length 2.4
  Top Layer w0.2: U1.5 28.35,29.75 28.575,29.525 R2.2
NetR3_2: R3.2 U2.16 | length 3.3
  Top Layer w0.2: R3.2 23,17 23.98,16.02 24.53,16.02 U2.16
"NRF CE": H2.1 U2.1 | length 19.3
  Top Layer w0.2: H2.1 12.65,5.9 14,7.25 20.75,7.25 25.5,12 U2.1
"NRF CS": H2.2 U2.2 | length 17.3
  Top Layer w0.2: H2.2 15.19,5.69 16,6.5 20.75,6.5 26,11.75 U2.2
"NRF INT": H2.5 U2.6 | length 13.1
  Top Layer w0.2: U2.6 28.7,14 28.75,13.95 v1(28.75,10.75)
  Bottom Layer w0.2: H2.5@22.75,3.63 22.75,4.75 v1(28.75,10.75)
"NRF MISO": H2.6 U2.5 | length 10.6
  Top Layer w0.2: H2.6@25.374,3.374 27.5,5.5 U2.5
"NRF MOSI": H2.3 U2.4 | length 15.8
  Top Layer w0.2: v1(26.75,10.75) 26.75,10.885 27,11.135 U2.4
  Bottom Layer w0.2: H2.3 17.75,3.02 17.73,3.04 17.73,4.98 23.5,10.75 v1(26.75,10.75)
"NRF SCK": H2.4 U2.3 | length 11.9
  Top Layer w0.2: H2.4@20.25,3.718 20.25,5.25 26.5,11.5 U2.3
"NRF XTAL 1": C10.1 R4.1 U2.10 Y1.1 | length 7.1
  Top Layer w0.2: U2.10 30.905,16 31.725,16.82 R4.1 Y1.1 33.5,18.325 C10.1
"NRF XTAL 2": C13.1 R4.2 U2.9 Y1.2 | length 6.9
  Top Layer w0.2: U2.9 28.55,15.503 28.775,15.511 31.75,15.516 33.485,15.519 Y1.2 33.5,13.925 C13.1
"SMA Antenna": A1.1 C1.2 L1.2 | length 7.1
  Top Layer w0.379: L1.2 C1.2 A1.1
TXRX: C6.1 C7.1 U1.4 | length 3.3
  Top Layer w0.379: C7.1 C6.1 U1.4
VDD_PA: C8.2 C9.2 L4.2 U2.11 | length 7
  Top Layer w0.379: U2.11 27.5,17.8 29.675,19.975 L4.2 C8.2 C9.2
pads on no net: U1.1 U1.7 U1.12 U1.13 U1.15 Y1.3 Y1.4

## Polygon pours and split planes (outlines as drawn)
+3V3 on Power Layer "+3V3 Power Poly" (solid, remove dead copper, pour order 2): 10,0 40,0 40,32 10,32
Earth on Power Layer "Earth Power Poly 1" (solid, remove dead copper, pour order 1): 50,0 40,0 40,50 50,50
Earth on Power Layer "Earth Power Poly 1" (solid, remove dead copper, pour order 0): 0,0 10,0 10,50 0,50
GND on Bottom Layer "Bottom GND Poly Pour" (hatched 45Degree grid 0.508 track 0.203, remove dead copper, pour order 5): 0,0 0,50 50,50 50,0
GND on Top Layer "Top GND Poly Pour" (hatched 45Degree grid 0.508 track 0.203, remove dead copper, pour order 6): 0,0 0,50 50,50 50,0
GND on Ground Layer "GND Poly" (solid, remove dead copper, pour order 4): 50,0 0,0 0,50 50,50

## Keep-outs
Keep-Out Layer:
  the board outline again, w0.2

## Other copper
Top Layer:
  pour cut-out: 20.25,50 20.25,32 29.75,32 29.75,50
  pour cut-out: 27.5,29.75 27.5,23 33.75,23 33.75,19 29.75,19 29.75,17 23.75,17 23.75,29.75
Power Layer:
  pour cut-out: 27.5,29.75 27.5,23 33.75,23 33.75,19 29.75,19 29.75,17 23.75,17 23.75,29.75
Bottom Layer:
  pour cut-out: 20.25,50 20.25,32 29.75,32 29.75,50

## Silkscreen, mask and mechanical layers (free items; w line width, h text height)
Top Overlay:
  drawing of 13 lines, arcs and shapes, not listed
  text "nRF24L01+PA / Mini Board" at 1.728,35 h1.5
  text "V0" at 8.75,31.25 h1.5
Bottom Overlay:
  region: 10.63,37.341 11.568,37.341 11.568,36.387 14.432,36.387 14.432,37.341 15.386,37.341 15.386,35.432 14.432,35.432 14.432,33.523 15.386,33.523 15.386,35.432 17.295,35.432 17.295,34.479 17.294,34.479 17.294,34.478 16.341,34.478 16.341,33.523 17.294,33.523 17.294,33.522 17.295,33.522 17.295,32.568 18.25,32.568 18.25,30.659 17.295,30.659 17.295,31.614 16.342,31.614 16.342,31.615 16.341,31.615 16.341,32.568 15.386,32.568 15.386,31.615 15.385,31.615 15.385,31.614 14.432,31.614 14.432,32.568 11.568,32.568 11.568,31.614 10.615,31.614 10.615,31.615 10.613,31.615 10.613,32.568 9.659,32.568 9.659,31.615 9.658,31.615 9.658,31.614 8.704,31.614 8.704,30.659 7.75,30.659 7.75,32.568 8.704,32.568 8.704,33.522 8.706,33.522 8.706,33.523 9.659,33.523 9.659,34.478 8.706,34.478 8.706,34.479 8.704,34.479 8.704,35.432 10.613,35.432 10.613,33.523 11.568,33.523 11.568,35.432 10.613,35.432 10.613,37.341 10.629,37.341
  region: 14.432,31.538 14.432,30.659 13.477,30.659 13.477,31.613 13.478,31.613 13.478,31.614 14.432,31.614 14.432,31.539
  region: 17.295,35.726 17.295,36.385 17.296,36.385 17.296,36.387 18.25,36.387 18.25,35.432 17.295,35.432 17.295,35.725
  region: 7.75,36.119 7.75,36.387 8.703,36.387 8.703,36.385 8.704,36.385 8.704,35.432 7.75,35.432 7.75,36.118
  region: 11.925,30.659 11.568,30.659 11.568,31.614 12.521,31.614 12.521,31.613 12.523,31.613 12.523,30.659 11.926,30.659
  lines w0.254: 35.25,30.932 35.758,30.424 ; 35.758,31.432 35.25,30.924 42.5,30.924 42.5,38.174 43.008,37.666 ; 39.8,45.5 41.5,45.5 40.992,46.008 ; 40.992,45 41.5,45.508 ; 42,37.666 42.508,38.174
  text "M3" at 39.25,44.9 h1.2
  text "Board" at 41.75,33.474 h1.2
  text "Dim" at 41.75,31.674 h1.2
  text "50mm" at 43.25,31.25 h1.2 r270
  text "50mm" at 41.074,29.224 h1.2
  text "Designed by / Russell MacGregor" at 21.422,26.127 h1
  text "GND" at 33.98,6.4 h1.5 r270
  text "+3V3" at 36.52,6.4 h1.5 r270
  text "CE" at 11.9,4.9 h1.5 r270
  text "CS" at 14.44,4.9 h1.5 r270
  text "MOSI" at 16.98,4.9 h1.5 r270
  text "SCK" at 19.52,4.9 h1.5 r270
  text "INT" at 22.06,4.9 h1.5 r270
  text "MISO" at 24.6,4.9 h1.5 r270
Poly Planning:
  lines w0.2: 10,0 40,0 ; 10,0 0,0 0,50 10,50 ; 10,0 10,32 ; 10,32 10,50 ; 10,32 40,32 ; 10,50 40,50 ; 40,0 50,0 50,50 40,50 ; 40,0 40,32 ; 40,32 40,50 ; 23.75,17 29.75,17 29.75,19 33.75,19 33.75,23 27.5,23 27.5,29.75 23.75,29.75 23.75,17